# Altium PCB PCB _basemount.PcbDoc
Units mm, origin at the board's own origin, x right, y up, seen from the top; angles counter-clockwise.
Board outline 65 x 56 mm, 2 copper layers (Top Layer, Bottom Layer); 60 components, 86 nets, 317 pads, 0 vias.
Unrouted connection lines stored in the file: 197.
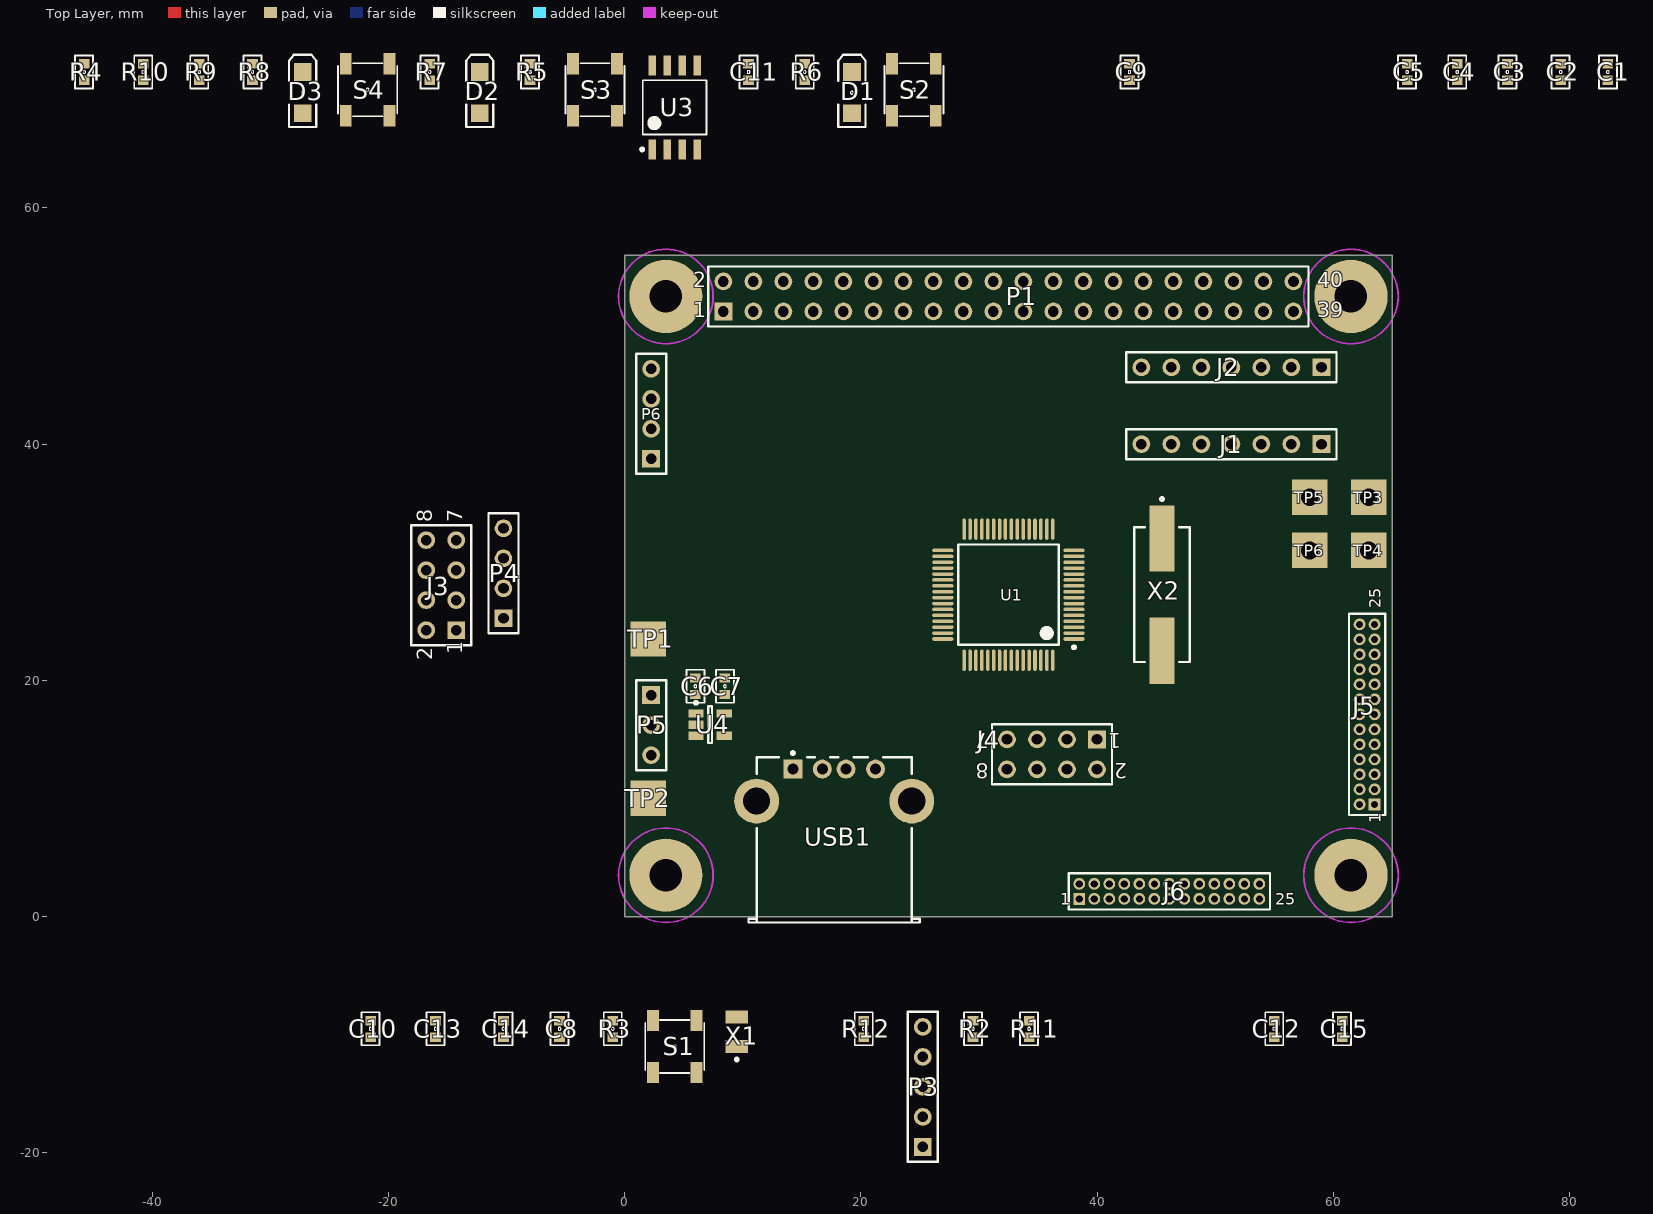
[diagram p0: Top Layer view]
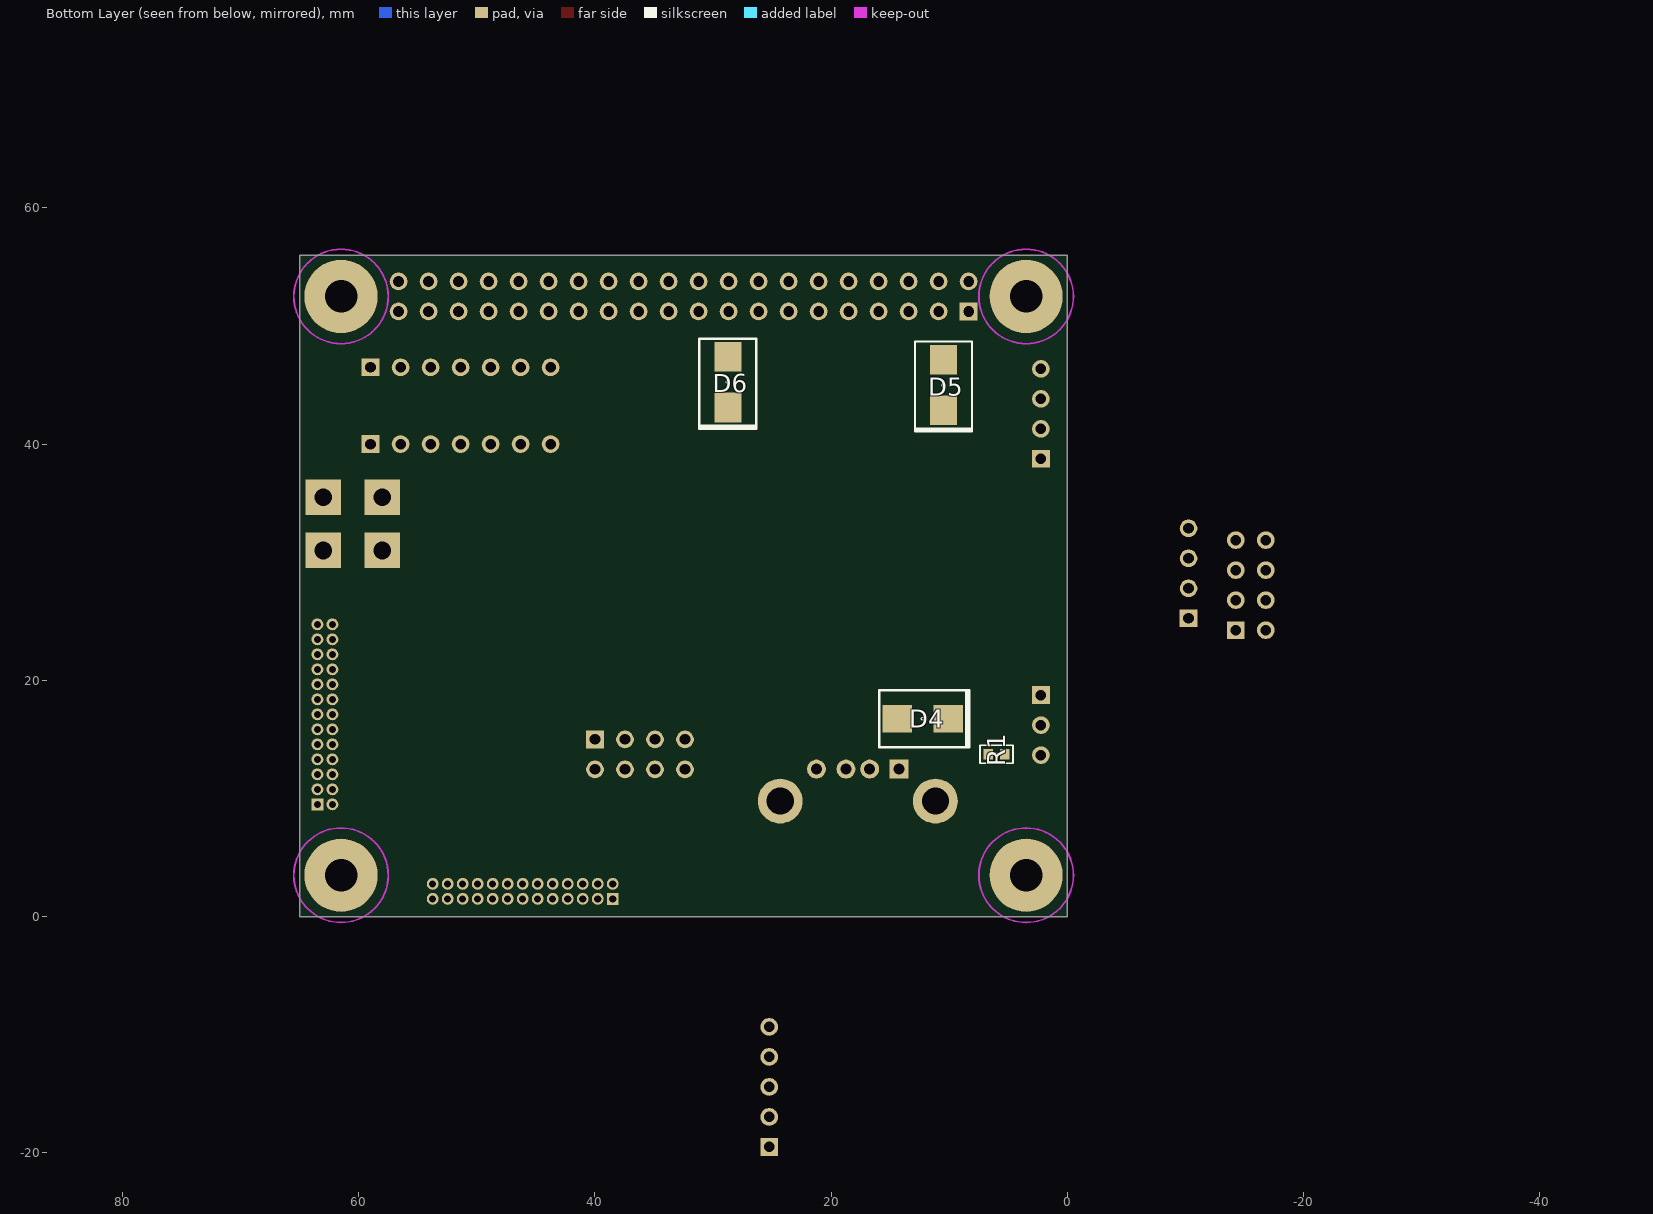
[diagram p1: Bottom Layer view, seen from below]

## Layer stack, top to bottom
Top Solder: solder mask 0.0102, Solder Resist, Dk 3.5
Top Layer: signal copper 0.0356
Dielectric1: dielectric 0.32, FR-4, Dk 4.8
Bottom Layer: signal copper 0.0356
Bottom Solder: solder mask 0.0102, Solder Resist, Dk 3.5

## Board outline
0,0 65,0 65,56 0,56

## Design rules (kind name [scope] priority, off if disabled: settings)
AssemblyTestPointUsage AssemblyTestPointUsage_1 [All] p2:
AssemblyTestpoint AssemblyTestpoint_1 [All] p2: testpointundercomponent=TRUE minsize=1.016 maxsize=2.54 preferedsize=1.524 minholesize=0 maxholesize=1.016 preferedholesize=0.813 testpointgrid=0.025 usegrid=TRUE gridtolerance=0 allowsidetop=TRUE allowsidebottom=TRUE
Clearance [All] p1: gap=0.2
ComponentClearance ComponentClearance_1 [All] p2: gap=0.254 collisioncheckmode=3 verticalgap=0.254 showdistances=FALSE
DiffPairsRouting DiffPairsRouting_1 [All] p2: maxlimit=0.254 minlimit=0.254 mostfreqgap=0.254 toplayer_minwidth=0.381 toplayer_maxwidth=0.381 toplayer_prefwidth=0.381 bottomlayer_minwidth=0.381 bottomlayer_maxwidth=0.381 bottomlayer_prefwidth=0.381 maxuncoupledlength=12.7
FabricationTestPointUsage TestPointUsage [All] p2: valid=0 allowmultiple=FALSE
FabricationTestpoint Testpoint [All] p2: side=3 testpointundercomponent=TRUE minsize=1.016 maxsize=2.54 preferedsize=1.524 minholesize=0 maxholesize=1.016 preferedholesize=0.813 testpointgrid=0.025 allowsidetop=TRUE allowsidebottom=TRUE usegrid=TRUE gridtolerance=0
FanoutControl Fanout_LCC [IsLCC] p1: bgadir=Out bgaviamode=Centered fanoutstyle=Auto fanoutdirection=Alternating viagrid=0.025 // Fanout_LCC (Default Rule)
FanoutControl Fanout_BGA [IsBGA] p2: bgadir=Out bgaviamode=Centered fanoutstyle=Auto fanoutdirection=Alternating viagrid=0.025 // Fanout_BGA (Default Rule)
FanoutControl Fanout_Default [All] p4: bgadir=Out bgaviamode=Centered fanoutstyle=Auto fanoutdirection=Alternating viagrid=0.025 // Fanout_Default (Default Rule)
FanoutControl Fanout_Small [(CompPinCount < 5)] p5: bgadir=Out bgaviamode=Centered fanoutstyle=Auto fanoutdirection=OutThenIn viagrid=0.025 // Fanout_Small (Default Rule)
FanoutControl Fanout_BGA_1 [IsBGA] p6: bgadir=Out bgaviamode=Centered fanoutstyle=Auto fanoutdirection=Alternating viagrid=0.025 // Fanout_BGA (Default Rule)
FanoutControl Fanout_LCC_1 [IsLCC] p7: bgadir=Out bgaviamode=Centered fanoutstyle=Auto fanoutdirection=Alternating viagrid=0.025 // Fanout_LCC (Default Rule)
FanoutControl Fanout_SOIC_1 [IsSOIC] p8: bgadir=Out bgaviamode=Centered fanoutstyle=Auto fanoutdirection=Alternating viagrid=0.025 // Fanout_SOIC (Default Rule)
FanoutControl Fanout_Small_1 [(CompPinCount < 5)] p9: bgadir=Out bgaviamode=Centered fanoutstyle=Auto fanoutdirection=OutThenIn viagrid=0.025 // Fanout_Small (Default Rule)
FanoutControl Fanout_Default_1 [All] p10: bgadir=Out bgaviamode=Centered fanoutstyle=Auto fanoutdirection=Alternating viagrid=0.025 // Fanout_Default (Default Rule)
Height Height_1 [All] p2: minheight=0 maxheight=25.4 prefheight=12.7
HoleSize HoleSize_1 [All] p2 off: absolutevalues=TRUE maxlimit=2.54 minlimit=0.025 maxpercent=80.000 minpercent=20.000
HoleToHoleClearance HoleToHoleClearance_1 [All] p2 off: gap=0.254 allowstackedmicrovias=TRUE
LayerPairs LayerPairs_1 [All] p2 off: enforce=TRUE
MinimumSolderMaskSliver MinimumSolderMaskSliver_1 [All] p2 off: minsoldermaskwidth=0.254
NetAntennae NetAntennae_1 [All] p2 off: netantennaetolerance=0
PasteMaskExpansion [All] p1: expansion=-0.05
PasteMaskExpansion PasteMaskExpansion_1 [All] p2: expansion=0
PlaneClearance PlaneClearance_1 [All] p2: clearance=0.508
PlaneConnect [All] p1: planeconnectstyle=Direct reliefexpansion=0.508 reliefentries=4 reliefconductorwidth=0.254 reliefairgap=0.254
PolygonConnect [All] p1: connectstyle=Direct reliefconductorwidth=0.254 reliefentries=4 polygonreliefangle="90 Angle" airgapwidth=0.254
PolygonConnect PolygonConnect_1 [All] p2: connectstyle=Relief reliefconductorwidth=0.254 reliefentries=4 polygonreliefangle="90 Angle" airgapwidth=0.254
RoomDefinition 03 [InComponentClass('03')] p1: confinementstyle=ConfineIn formatcopy=TRUE lockcomponents=FALSE outline 83,-15 362.5,-15 362.5,41 83,41
RoutingPriority RoutingPriority_1 [All] p2: routingpriority=0
RoutingTopology [All] p1: topology=Horizontal
RoutingTopology RoutingTopology_1 [All] p2: topology=Shortest
RoutingVias [All] p1: holewidth=0.6 width=1 viastyle="Through Hole" minholewidth=0.711 minwidth=1.27 maxholewidth=0.711 maxwidth=1.27
ShortCircuit ShortCircuit_1 [All] p2: allowed=FALSE
SilkToBoardRegionClearance SilkToBoardRegionClearance_1 [All] p2:
SilkToSilkClearance SilkToSilkClearance_1 [All] p2 off: silktosilkclearance=0.254
SilkToSolderMaskClearance SilkscreenOverComponentPads [IsPad] p2 off: minsilkscreentomaskgap=0.254 clearancetoexposedcopper=TRUE
SolderMaskExpansion [All] p1: expansion=0.1
SolderMaskExpansion SolderMaskExpansion_1 [All] p2: expansion=0.102
UnRoutedNet UnRoutedNet_1 [All] p2:
UnpouredPolygon UnpouredPolygon_1 [All] p2:
Width [All] p1: maxlimit=1 minlimit=0.2 preferedwidth=0.5 minimp=50.000000 maximp=50.000000 favimp=50.000000
23 further rules are at their usual default settings.

## Components (designator, comment, footprint, x,y, rotation, side; value= is the part's Value field where it differs from the comment)
C1 "0.1uF" 1608[0603] 83.25,71.5 r90 top
C2 "0.1uF" 1608[0603] 79.25,71.5 r90 top
C3 "0.1uF" 1608[0603] 74.75,71.5 r90 top
C4 "0.1uF" 1608[0603] 70.5,71.5 r90 top
C5 "0.1uF" 1608[0603] 66.25,71.5 r90 top
C6 "1uF" 1608[0603] 6,19.5 r270 top
C7 "1uF" 1608[0603] 8.5,19.5 r270 top
C8 "0.1uF" 1608[0603] -5.5,-9.5 r90 top
C9 "0.1uF" 1608[0603] 42.75,71.5 r90 top
C10 "1000pF" 1608[0603] -21.5,-9.5 r90 top
C11 "0.1uF" 1608[0603] 10.5,71.5 r90 top
C12 "15pF" 1608[0603] 55,-9.5 r90 top
C13 "15pF" 1608[0603] -16,-9.5 r90 top
C14 "22pF" 1608[0603] -10.25,-9.5 r90 top
C15 "22pF" 1608[0603] 60.75,-9.5 r90 top
D1 "LED2" 3.2X1.6X1.1 19.25,69.75 r90 top
D2 "LED2" 3.2X1.6X1.1 -12.25,69.75 r90 top
D3 "LED2" 3.2X1.6X1.1 -27.25,69.75 r90 top
D4 "B340LB-13-F" DIOM4336X25N 12.25,16.75 r180 bottom
D5 "B340LB-13-F" DIOM4336X25N 10.5,45 r270 bottom
D6 "B340LB-13-F" DIOM4336X25N 28.75,45.25 r270 bottom
J1 "Header 7" HDR1X7 59,40 r180 top
J2 "Header 7" HDR1X7 59,46.5 r180 top
J3 "NRF2401" HDR2X4 -14.25,24.25 r90 top
J4 "NRF2401" HDR2X4 40,15 r180 top
J5 "MHDR2X13" MHDR2X13 63.5,9.5 r90 top
J6 "MHDR2X13" MHDR2X13 38.5,1.5 r0 top
P1 "RaspberryPi Header 20X2" HDR2X20 32.5,52.5 r0 top
P3 "Header 5" HDR1X5 25.25,-19.5 r90 top
P4 "ISP DOWNLOAD PORT" HDR1X4 -10.25,25.25 r90 top
P5 "Header 3" HDR1X3 2.25,18.75 r270 top
P6 "Header 4" HDR1X4 2.25,38.75 r90 top
R1 "10K" 1608[0603] 6,13.75 r0 bottom
R2 "22" 1608[0603] 29.5,-9.5 r90 top
R3 "22" 1608[0603] -1,-9.5 r90 top
R4 "1.5k" 1608[0603] -45.75,71.5 r90 top
R5 "10k" 1608[0603] -8,71.5 r90 top
R6 "510" 1608[0603] 15.25,71.5 r90 top
R7 "510" 1608[0603] -16.5,71.5 r90 top
R8 "510" 1608[0603] -31.5,71.5 r90 top
R9 "10K" 1608[0603] -36,71.5 r90 top
R10 "10K" 1608[0603] -40.75,71.5 r90 top
R11 "10K" 1608[0603] 34.25,-9.5 r90 top
R12 "1M" 1608[0603] 20.25,-9.5 r90 top
S1 "TSKB-2JL" TSKB-2JL 4.25,-11 r90 top
S2 "TSKB-2JL" TSKB-2JL 24.5,70 r90 top
S3 "TSKB-2JL" TSKB-2JL -2.5,70 r90 top
S4 "TSKB-2JL" TSKB-2JL -21.75,70 r90 top
TP1 "5V_BATT" PAD1#1 2,23.5 r90 top
TP2 "GND_BATT" PAD1#1 2,10 r90 top
TP3 "" PAD1#2 63,35.5 r0 top
TP4 "" PAD1#2 63,31 r0 top
TP5 "" PAD1#2 58,35.5 r0 top
TP6 "" PAD1#2 58,31 r0 top
U1 "STM32F103RCT6TR" STM-LQFP64_N 32.5,27.25 r180 top
U3 "W25X16" SOIC-SSCODE_SOIC127P790X216-8N 4.25,68.5 r90 top
U4 "MCP1801T-3302I/OT" SOT-23-OT5_M 7.25,16.25 r0 top
USB1 "USB002" USB2.5-2H4C 17.75,-0.5 r270 top
X1 "ABS07-32.768KHz-T" ABRA-ABS07-2_V 9.5,-9.75 r90 top
X2 "ABLS2-4.096MHZ-D4Y-T" ABRA-ABLS2-2_V 45.5,27.25 r270 top

## Footprints (in the part's own frame and the unit in brackets; to place one, negate y for a bottom-side part, rotate by r counter-clockwise, add the part's x,y. Pads: shape width x height; smd on the part's side, far side on the other; paste and mask are expansions set on the pad)
3.2X1.6X1.1 [mm] "SMT LED; 2 Flat Leads"
  rect 1.5x1.5 smd: 1(-1.75,0) 2(1.75,0)
  silkscreen extent -2.9,-1.15 3.2,1.15
1608[0603] [mm] "Chip Capacitor, Body 1.6x0.8mm, IPC High Density"
  rect 0.8x0.9 smd: 1(-0.7,0) 2(0.7,0)
  silkscreen extent -1.4,-0.76 1.4,0.76, body extent -0.87,-0.48 0.87,0.48, height 1.3
ABRA-ABLS2-2_V [mm] "SMD, 2-Leads, Body 11.4x4.7mm, Height 3.3mm"
  rect 5.6x2.1 smd: 1(-4.75,0) 2(4.75,0)
  silkscreen extent -8.22,-2.35 5.7,2.35, body extent -5.7,-2.35 5.7,2.35, height 3.3
ABRA-ABS07-2_V [mm] "Hand Drawn, 2-Leads, Body 3.2x1.5mm, Pitch 2.5mm"
  rect 1.1x1.9 smd: 1(-1.25,0) 2(1.25,0)
  silkscreen extent -2.47,-0.13 -2.23,0.12, body extent -1.6,-0.75 1.6,0.75, height 0.9
DIOM4336X25N [mm] "Molded Diode, 2-Leads, Body 4.31x3.62mm, IPC Medium Density"
  rect 2.5x2.3 smd: 1(-2.15,0) 2(2.15,0)
  silkscreen extent -3.68,-2.41 3.94,2.41, body extent -2.51,-1.97 2.5,1.97, height 2.5
HDR1X3 [mm] "Connector; Header; 3 Position"
  rect 1.5x1.5 hole 0.9: 1(0,0)
  round 1.5 hole 0.9: 2(2.54,0) 3(5.08,0)
  silkscreen extent -1.27,-1.27 6.35,1.27
HDR1X4 [mm] "Connector; Header; 4 Position"
  rect 1.5x1.5 hole 0.9: 1(0,0)
  round 1.5 hole 0.9: 2(2.54,0) 3(5.08,0) 4(7.62,0)
  silkscreen extent -1.27,-1.27 8.89,1.27
HDR1X5 [mm] "Connector; Header; 5 Position"
  rect 1.5x1.5 hole 0.9: 1(0,0)
  round 1.5 hole 0.9: 2(2.54,0) 3(5.08,0) 4(7.62,0) 5(10.16,0)
  silkscreen extent -1.27,-1.27 11.43,1.27
HDR1X7 [mm] "Connector; Header; 7 Position"
  rect 1.5x1.5 hole 0.9: 1(0,0)
  round 1.5 hole 0.9: 2(2.54,0) 3(5.08,0) 4(7.62,0) 5(10.16,0) 6(12.7,0) 7(15.24,0)
  silkscreen extent -1.27,-1.27 16.51,1.27
HDR2X4 [mm] "Connector; Header; 4x2 Position"
  rect 1.5x1.5 hole 0.9: 1(0,0)
  round 1.5 hole 0.9: 2(0,2.54) 3(2.54,0) 4(2.54,2.54) 5(5.08,0) 6(5.08,2.54) 7(7.62,0) 8(7.62,2.54)
  silkscreen extent -1.27,-1.27 8.89,3.81
HDR2X20 [mm] "Connector; Header; 20x2 Position"
  rect 1.5x1.5 hole 0.9: 1(-24.13,-1.27)
  round 1.5 hole 0.9: 2(-24.13,1.27) 3(-21.59,-1.27) 4(-21.59,1.27) 5(-19.05,-1.27) 6(-19.05,1.27) 7(-16.51,-1.27) 8(-16.51,1.27) 9(-13.97,-1.27) 10(-13.97,1.27) 11(-11.43,-1.27) 12(-11.43,1.27) 13(-8.89,-1.27) 14(-8.89,1.27) 15(-6.35,-1.27) 16(-6.35,1.27) 17(-3.81,-1.27) 18(-3.81,1.27) 19(-1.27,-1.27) 20(-1.27,1.27) 21(1.27,-1.27) 22(1.27,1.27) 23(3.81,-1.27) 24(3.81,1.27) 25(6.35,-1.27) 26(6.35,1.27) 27(8.89,-1.27) 28(8.89,1.27) 29(11.43,-1.27) 30(11.43,1.27) 31(13.97,-1.27) 32(13.97,1.27) 33(16.51,-1.27) 34(16.51,1.27) 35(19.05,-1.27) 36(19.05,1.27) 37(21.59,-1.27) 38(21.59,1.27) 39(24.13,-1.27) 40(24.13,1.27)
  silkscreen extent -25.4,-2.54 25.4,2.54
MHDR2X13 [mm] "Connector; Header; 13x2 Position"
  rect 1x1 hole 0.6: 1(0,0)
  round 1 hole 0.6: 2(0,1.27) 3(1.27,0) 4(1.27,1.27) 5(2.54,0) 6(2.54,1.27) 7(3.81,0) 8(3.81,1.27) 9(5.08,0) 10(5.08,1.27) 11(6.35,0) 12(6.35,1.27) 13(7.62,0) 14(7.62,1.27) 15(8.89,0) 16(8.89,1.27) 17(10.16,0) 18(10.16,1.27) 19(11.43,0) 20(11.43,1.27) 21(12.7,0) 22(12.7,1.27) 23(13.97,0) 24(13.97,1.27) 25(15.24,0) 26(15.24,1.27)
  silkscreen extent -0.9,-0.9 16.14,2.17
PAD1#1 [mm]
  rect 3x3 smd: 1(0,0)
PAD1#2 [mm]
  rect 3x3 hole 1.5: 1(0,0)
SOIC-SSCODE_SOIC127P790X216-8N [mm] "SOIC, 8-Leads, Body 5.28x5.28mm, Pitch 1.27mm, IPC Medium Density"
  rect 1.7x0.6 smd: 1(-3.55,1.905) 2(-3.55,0.635) 3(-3.55,-0.635) 4(-3.55,-1.905) 5(3.55,-1.905) 6(3.55,-0.635) 7(3.55,0.635) 8(3.55,1.905)
  silkscreen extent -3.67,-2.7 2.3,2.88, body extent -3.95,-2.7 3.95,2.7, height 2.16
SOT-23-OT5_M [mm] "SOT23, 5-Leads, Body 2.9x1.7mm, Pitch 0.95mm, Lead Span 2.8mm, IPC Low Density"
  rect 1.3x0.7 smd: 1(-1.2,0.95) 2(-1.2,0) 3(-1.2,-0.95) 4(1.2,-0.95) 5(1.2,0.95)
  silkscreen extent -1.32,-1.55 0.15,1.97, body extent -0.9,-1.55 0.9,1.55, height 1.45
STM-LQFP64_N [mm] "Thin QFP, 64-Leads, Body 10x10mm, Pitch 0.5mm, IPC Medium Density"
  oval 1.8x0.3 smd: 1(-5.55,3.75) 2(-5.55,3.25) 3(-5.55,2.75) 4(-5.55,2.25) 5(-5.55,1.75) 6(-5.55,1.25) 7(-5.55,0.75) 8(-5.55,0.25) 9(-5.55,-0.25) 10(-5.55,-0.75) 11(-5.55,-1.25) 12(-5.55,-1.75) 13(-5.55,-2.25) 14(-5.55,-2.75) 15(-5.55,-3.25) 16(-5.55,-3.75) 33(5.55,-3.75) 34(5.55,-3.25) 35(5.55,-2.75) 36(5.55,-2.25) 37(5.55,-1.75) 38(5.55,-1.25) 39(5.55,-0.75) 40(5.55,-0.25) 41(5.55,0.25) 42(5.55,0.75) 43(5.55,1.25) 44(5.55,1.75) 45(5.55,2.25) 46(5.55,2.75) 47(5.55,3.25) 48(5.55,3.75)
  oval 0.3x1.8 smd: 17(-3.75,-5.55) 18(-3.25,-5.55) 19(-2.75,-5.55) 20(-2.25,-5.55) 21(-1.75,-5.55) 22(-1.25,-5.55) 23(-0.75,-5.55) 24(-0.25,-5.55) 25(0.25,-5.55) 26(0.75,-5.55) 27(1.25,-5.55) 28(1.75,-5.55) 29(2.25,-5.55) 30(2.75,-5.55) 31(3.25,-5.55) 32(3.75,-5.55) 49(3.75,5.55) 50(3.25,5.55) 51(2.75,5.55) 52(2.25,5.55) 53(1.75,5.55) 54(1.25,5.55) 55(0.75,5.55) 56(0.25,5.55) 57(-0.25,5.55) 58(-0.75,5.55) 59(-1.25,5.55) 60(-1.75,5.55) 61(-2.25,5.55) 62(-2.75,5.55) 63(-3.25,5.55) 64(-3.75,5.55)
  silkscreen extent -5.68,-4.25 4.25,4.57, body extent -5,-5 5,5, height 1.6
TSKB-2JL [mm] "tact switch"
  rect 1.8x1 smd: 1(-2.2,1.85) 2(-2.2,-1.85) 3(2.2,1.85) 4(2.2,-1.85)
  silkscreen extent -2.25,-2.5 2.25,2.5
USB2.5-2H4C [mm] "Connector; USB1.1, Type A, Thru-Hole; 4 Position; Right Angle"
  rect 1.6x1.6 hole 0.92: 1(-12.99,-3.5)
  round 1.6 hole 0.92: 2(-12.99,-1) 3(-12.99,1) 4(-12.99,3.5)
  round 3.8 hole 2.3: 5(-10.28,6.57) 6(-10.28,-6.57)
  silkscreen extent -14.46,-7.25 0,7.25, body extent -14,-7.25 0,7.25, height 7.01

## Part data
C1 C2 C3 C4 C5 C6 C7 C8 C9 C10 C11 C12 C13 C14 C15: library part Cap, "Capacitor"
D1 D2 D3: "Typical RED, GREEN, YELLOW, AMBER GaAs LED"
D4 D5 D6: library part "D Schottky", "Schottky Diode"
J1 J2: "Header, 7-Pin"
J3: library part "Header 4X2", "Header, 4-Pin, Dual row"
J4: library part "Header 8", "Header, 8-Pin"
J5 J6: "Header, 13-Pin, Dual row"
P1: library part "Header 20X2", "Header, 20-Pin, Dual row"
P3: "Header, 5-Pin"
P4: library part "Header 4", "Header, 4-Pin"
P5: "Header, 3-Pin"
P6: "Header, 4-Pin"
R1 R2 R3 R4 R5 R6 R7 R8 R9 R10 R11 R12: library part Res1, "Resistor"
S1 S2 S3 S4: library part SW-PB, "Switch"
TP1 TP2 TP3 TP4 TP5 TP6: library part RAUND1
U1: library part CMP-0237-00202-3, "ARM Cortex-M3 32-bit MCU, 256 KB Flash, 48 KB Internal RAM, 51 I/Os, 64-pin LQFP, -40 to 85 degC, Tape and Reel"
U4: library part CMP-0136-00719-1, "150 mA, High PSRR, Low Quiescent Current LDO, 5-Pin SOT-23, Industrial Temperature, Tape and Reel"
X1: library part CMP-0447-00001-2, "Crystal, 32.768 kHz, 12.5 pF, -40 to 85 degC, SMD Low Profile 3.2 x 1.5 x 0.9 mm, Tape and Reel"
X2: library part CMP-0277-00002-1, "Low Profile Surface Mount Microprocessor Crystal, 4.096 MHz +/-30 ppm, 180 Ohm, -40 to 85 degC, 2-Pin 11.4 x 4.7 x 3.3 mm SMD, RoHS, Tape and Reel"

## Free pads (board coordinates)
  round 6.2 hole 2.75: ""(3.5,3.5) ""(3.5,52.5) ""(61.5,3.5) ""(61.5,52.5)

## Nets (pads, with @x,y where several pads share a name; then routed paths per layer and width w, separated by ;. In a path a pad name is that pad's centre, name@x,y a point inside that pad or via, vN(x,y) a via of type N, cw(c..) or ccw(c..) an arc to the next point about the centre after c; other vN are vias at no path point)
3V3: C1.2 C2.2 C3.2 C4.2 C5.2 C7.2 C9.1 C11.2 D6.2 J2.2 J3.2 J4.1 J5.9 J5.21 J5.22 P3.1 R4.1 R5.2 R6.2 R7.2 R8.2 R11.1 S2.1 U1.1 U1.13 U1.16 U1.19 U1.32 U1.48 U1.64 U3.3 U3.7 U3.8 U4.5
5V: C6.2 D5.2 J1.2 P4.1 P5.2 U4.1 U4.3
5V_BATT: P5.1 TP1.1
5V_USB: P5.3 R1.1
A0: J4.7 J6.6 U1.38
AENBL: J2.5 P1.33
APHASE: J2.6 P1.31
ARM_HORIZ: P1.15 P6.1
ARM_VERT: P1.13 P6.2
BENBL: J2.3 P1.37
BOOT0: R9.1 U1.60
BOOT1: R10.1 U1.28
BPHASE: J2.4 P1.35
CS: J4.5 J6.1 U1.33
GND: C1.1 C2.1 C3.1 C4.1 C5.1 C6.1 C7.1 C8.1 C9.2 C11.1 C12.2 C13.2 C14.2 C15.2 D3.1 J1.1 J2.1 J3.1 J4.2 J5.1 J5.25 J5.26 J6.26 P1.6 P1.9 P1.14 P1.20 P1.25 P1.30 P1.34 P1.39 P3.5 P4.2 S1.2 S3.1 S4.1 TP2.1 U1.12 U1.18 U1.31 U1.47 U1.63 U3.4 U4.2 USB1.4 USB1.5
KEY0: J5.4 S3.2 U1.9
KEY1: J5.2 S4.2 U1.2
LED0: D1.1 J6.9 U1.41
LED1: D2.1 J6.18 U1.54
MODE: J2.7 P1.29
NetC10_2: C10.2 P3.3
NetD1_2: D1.2 R6.1
NetD2_2: D2.2 R7.1
NetD3_2: D3.2 R8.1
NetD4_1: D4.1 USB1.1
NetD4_2: D4.2 R1.2
NetD5_1: D5.1 P1.2 P1.4
NetD6_1: D6.1 P1.1 P1.17
NetJ1_3: J1.3 TP3.1
NetJ1_4: J1.4 TP4.1
NetJ1_5: J1.5 TP5.1
NetJ1_6: J1.6 TP6.1
NetJ5_23: J5.23 R9.2
NetJ5_24: J5.24 R10.2
NetR2_2: R2.2 USB1.2
NetR3_2: R3.2 R4.2 USB1.3
NetR5_1: R5.1 U3.1
NRF_CE: J3.3 J5.11 U1.20
NRF_CS: J3.4 J5.15 U1.24
NRF_IRQ: J3.8 J5.16 U1.25
OSC_IN1: C12.1 U1.3 X1.2
OSC_IN2: C15.1 R12.1 U1.5 X2.2
OSC_OUT1: C13.1 U1.4 X1.1
OSC_OUT2: C14.1 R12.2 U1.6 X2.1
PA0: J5.7 S2.2 U1.14
PA1: J5.8 U1.15
PA3: J5.10 U1.17
PA5: J3.5 J5.12 U1.21 U3.6
PA6: J3.7 J5.13 U1.22 U3.2
PA7: J3.6 J5.14 U1.23 U3.5
PA9: J6.10 P4.4 U1.42
PA10: J6.11 P4.3 U1.43
PA11: R2.1 U1.44
PA12: R3.1 U1.45
PA13: J6.12
PA14: J6.13
PA15: J6.14 U1.50
PB0: J5.17 U1.26
PB1: J5.18 U1.27
PB3: J6.19 U1.55
PB4: J6.20 U1.56
PB5: J6.21 U1.57
PB6: J6.22 U1.58
PB7: J6.23 U1.59
PB8: J6.24 U1.61
PB9: J6.25 U1.62
PB10: J5.19 U1.29
PB11: J5.20 U1.30
PB13: J4.4 J6.2 U1.34
PB14: J6.3 U1.35
PB15: J4.3 J6.4 U1.36
PC0: J5.3 U1.8
PC2: J5.5 U1.10
PC3: J5.6 U1.11
PC6: J6.5 U1.37
PC8: J6.7 U1.39
PC9: J6.8 U1.40
PC10: J6.15 U1.51
PC11: J6.16 U1.52
PC12: J6.17 U1.53
RESET: C8.2 J4.6 R11.2 S1.1 U1.7
SWCLK: P3.2 U1.49
SWDAT: C10.1 P3.4 U1.46
UART_RX: P1.10 P6.3
UART_TX: P1.8 P6.4
VMM: J1.7
pads on no net: J4.8 P1.3 P1.5 P1.7 P1.11 P1.12 P1.16 P1.18 P1.19 P1.21 P1.22 P1.23 P1.24 P1.26 P1.27 P1.28 P1.32 P1.36 P1.38 P1.40 S1.3 S1.4 S2.3 S2.4 S3.3 S3.4 S4.3 S4.4 U4.4 USB1.6

## Keep-outs
Keep-Out Layer:
  circle w0.15: c61.5,3.5 r4
  circle w0.15: c61.5,52.5 r4
  circle w0.15: c3.5,52.5 r4
  circle w0.15: c3.5,3.5 r4

## Silkscreen, mask and mechanical layers (free items; w line width, h text height)
Mechanical 1:
  the board outline again, w0.15
Mechanical 16:
  drawing of 1874 lines, arcs and shapes, not listed
  text "1" at -29.286,135.509 h1.78
  text "2" at 43.358,135.509 h1.78
  text "3" at 116.51,135.509 h1.78
  text "4" at 189.408,135.509 h1.78
  text "A" at -63.627,112.497 h1.78
  text "A" at 223.393,112.497 h1.78
  text "B" at -63.627,64.44 h1.78
  text "B" at 223.393,64.44 h1.78
  text "C" at -63.627,15.926 h1.78
  text "C" at 225.755,-0.642 h1.78
  text "ENGINEER:" at 108.458,-21.082 h1.14
  text "TITLE:" at 146.558,-21.082 h1.14
  text "PCB DESIGNER:" at 108.458,-28.575 h1.14
  text "D" at -63.627,-32.08 h1.78
  text "D" at 223.393,-32.08 h1.78
  text "DATE:" at 108.458,-36.322 h1.14
  text "PART NO.:" at 146.558,-36.322 h1.14
  text "REV:" at 199.898,-36.322 h1.14
  text "Altium Limited" at 75.438,-38.862 h1.78
  text ".PRINT_DATE" at 109.728,-39.37 h1.78
  text "12a Rodborough Rd" at 75.438,-41.402 h1.78
  text "Frenchs Forest" at 75.438,-43.942 h1.78
  text "FILE NAME:" at 108.458,-43.942 h1.14
  text "DWG NO:" at 146.558,-43.942 h1.14
  text "SCALE:" at 199.898,-43.942 h1.14
  text "NSW 2086" at 75.438,-46.482 h1.78
  text ".PCB_FILE_NAME_NO_PATH" at 109.728,-46.99 h1.78
  text "1" at -29.286,-52.451 h1.78
  text "2" at 43.358,-52.451 h1.78
  text "3" at 116.51,-52.451 h1.78
  text "4" at 189.408,-52.451 h1.78
Drill Drawing:
  drawing of 314 lines, arcs and shapes, not listed
  text "Symbol" at -52.768,128.397 h1.83
  text "Count" at -39.919,128.397 h1.83
  text "Hole Size" at -24.937,128.397 h1.83
  text "Plated" at 4.264,128.397 h1.83
  text "Hole Type" at 17.113,128.397 h1.83
  text "Drill Layer Pair" at 35.752,128.397 h1.83
  text "Via/Pad" at 73.841,128.397 h1.83
  text "Pad Shape" at 88.823,128.397 h1.83
  text "Template" at 107.766,128.397 h1.83
  text "Description" at 124.272,128.397 h1.83
  text "Hole Tolerance (+)" at 145.957,128.397 h1.83
  text "Hole Tolerance (-)" at 179.831,128.397 h1.83
  text "2" at -39.919,124.587 h1.52
  text "2.300mm (90.55mil)" at -24.937,124.587 h1.52
  text "PTH" at 4.264,124.587 h1.52
  text "Round" at 17.113,124.587 h1.52
  text "Top Layer - Bottom Layer" at 35.752,124.587 h1.52
  text "Pad" at 73.841,124.587 h1.52
  text "Rounded" at 88.823,124.587 h1.52
  text "c380h230" at 107.766,124.587 h1.52
  text "4" at -39.919,120.777 h1.52
  text "0.920mm (36.22mil)" at -24.937,120.777 h1.52
  text "PTH" at 4.264,120.777 h1.52
  text "Round" at 17.113,120.777 h1.52
  text "Top Layer - Bottom Layer" at 35.752,120.777 h1.52
  text "Pad" at 73.841,120.777 h1.52
  text "(Mixed)" at 88.823,120.777 h1.52
  text "(Mixed)" at 107.766,120.777 h1.52
  text "4" at -39.919,116.967 h1.52
  text "1.500mm (59.06mil)" at -24.937,116.967 h1.52
  text "PTH" at 4.264,116.967 h1.52
  text "Round" at 17.113,116.967 h1.52
  text "Top Layer - Bottom Layer" at 35.752,116.967 h1.52
  text "Pad" at 73.841,116.967 h1.52
  text "Rectangle" at 88.823,116.967 h1.52
  text "s300h150" at 107.766,116.967 h1.52
  text "4" at -39.919,113.157 h1.52
  text "2.750mm (108.27mil)" at -24.937,113.157 h1.52
  text "PTH" at 4.264,113.157 h1.52
  text "Round" at 17.113,113.157 h1.52
  text "Top Layer - Bottom Layer" at 35.752,113.157 h1.52
  text "Pad" at 73.841,113.157 h1.52
  text "Rounded" at 88.823,113.157 h1.52
  text "c620h275" at 107.766,113.157 h1.52
  text "52" at -39.919,109.347 h1.52
  text "0.600mm (23.62mil)" at -24.937,109.347 h1.52
  text "PTH" at 4.264,109.347 h1.52
  text "Round" at 17.113,109.347 h1.52
  text "Top Layer - Bottom Layer" at 35.752,109.347 h1.52
  text "Pad" at 73.841,109.347 h1.52
  text "(Mixed)" at 88.823,109.347 h1.52
  text "(Mixed)" at 107.766,109.347 h1.52
  text "Layer" at 96.589,107.096 h1.52
  text "Name" at 107.001,107.096 h1.52
  text "Material" at 130.617,107.096 h1.52
  text "Thickness" at 152.455,107.096 h1.52
  text "Constant" at 168.961,107.096 h1.52
  text "Board Layer Stack" at 183.435,107.096 h1.52
  text "86" at -39.919,105.537 h1.52
  text "0.900mm (35.43mil)" at -24.937,105.537 h1.52
  text "PTH" at 4.264,105.537 h1.52
  text "Round" at 17.113,105.537 h1.52
  text "Top Layer - Bottom Layer" at 35.752,105.537 h1.52
  text "Pad" at 73.841,105.537 h1.52
  text "(Mixed)" at 88.823,105.537 h1.52
  text "(Mixed)" at 107.766,105.537 h1.52
  text "1" at 96.589,104.048 h1.52
  text "Top Overlay" at 107.001,104.048 h1.52
  text "152 Total" at -39.919,101.727 h1.52
  text "2" at 96.589,101 h1.52
  text "Top Solder" at 107.001,101 h1.52
  text "Solder Resist" at 130.617,101 h1.52
  text "0.010mm" at 152.455,101 h1.52
  text "3.5" at 168.961,101 h1.52
  text "3" at 96.589,97.952 h1.52
  text "Top Layer" at 107.001,97.952 h1.52
  text "Copper" at 130.617,97.952 h1.52
  text "0.036mm" at 152.455,97.952 h1.52
  text "4" at 96.589,94.904 h1.52
  text "Dielectric1" at 107.001,94.904 h1.52
  text "FR-4" at 130.617,94.904 h1.52
  text "0.320mm" at 152.455,94.904 h1.52
  text "4.8" at 168.961,94.904 h1.52
  text "5" at 96.589,91.856 h1.52
  text "Bottom Layer" at 107.001,91.856 h1.52
  text "Copper" at 130.617,91.856 h1.52
  text "0.036mm" at 152.455,91.856 h1.52
  text "6" at 96.589,88.808 h1.52
  text "Bottom Solder" at 107.001,88.808 h1.52
  text "Solder Resist" at 130.617,88.808 h1.52
  text "0.010mm" at 152.455,88.808 h1.52
  text "3.5" at 168.961,88.808 h1.52
  text "7" at 96.589,85.76 h1.52
  text "Bottom Overlay" at 107.001,85.76 h1.52

## Text inside footprints (layer, text, board x,y; h text height)
J3: Top Overlay "8" at -16.282,33.394 h1.27 r90; Top Overlay "7" at -13.742,33.394 h1.27 r90; Top Overlay "1" at -13.742,22.218 h1.27 r90; Top Overlay "2" at -16.282,21.71 h1.27 r90
J4: Top Overlay "2" at 42.54,12.968 h1.27 r180; Top Overlay "1" at 42.032,15.508 h1.27 r180; Top Overlay "7" at 30.856,15.508 h1.27 r180; Top Overlay "8" at 30.856,12.968 h1.27 r180
J5: Top Overlay "1" at 64.008,7.9 h1 r90; Top Overlay "25" at 64.008,26.1 h1 r90
J6: Top Overlay "1" at 36.9,0.992 h1; Top Overlay "25" at 55.1,0.992 h1
P1: Top Overlay "39" at 58.662,50.722 h1.27; Top Overlay "40" at 58.662,53.262 h1.27; Top Overlay "2" at 5.83,53.262 h1.27; Top Overlay "1" at 5.83,50.722 h1.27